# Altium PCB PCB1.PcbDoc
Units mm, origin at the board's own origin, x right, y up, seen from the top; angles counter-clockwise.
Board outline 12 x 17.6 mm, 2 copper layers (Top Layer, Bottom Layer); 9 components, 7 nets, 27 pads, 5 vias.
Unrouted connection lines stored in the file: 1.
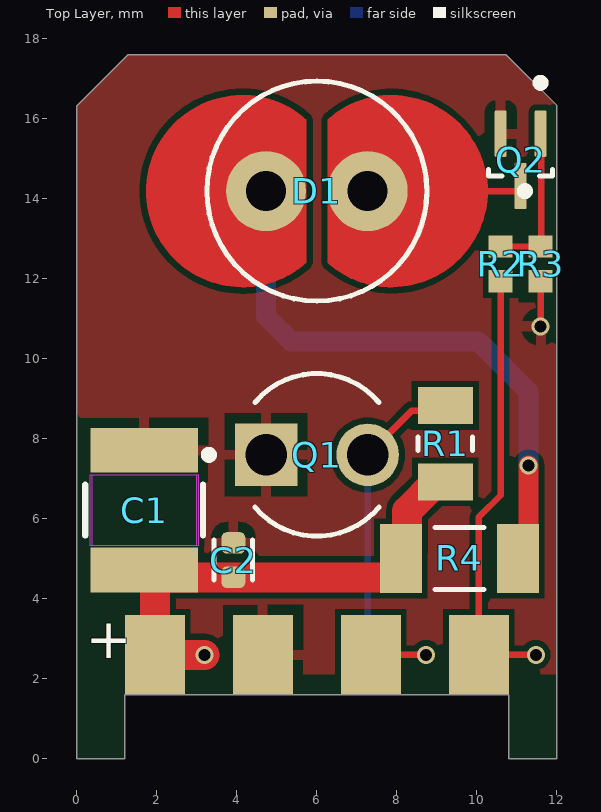
[diagram p0: Top Layer view]
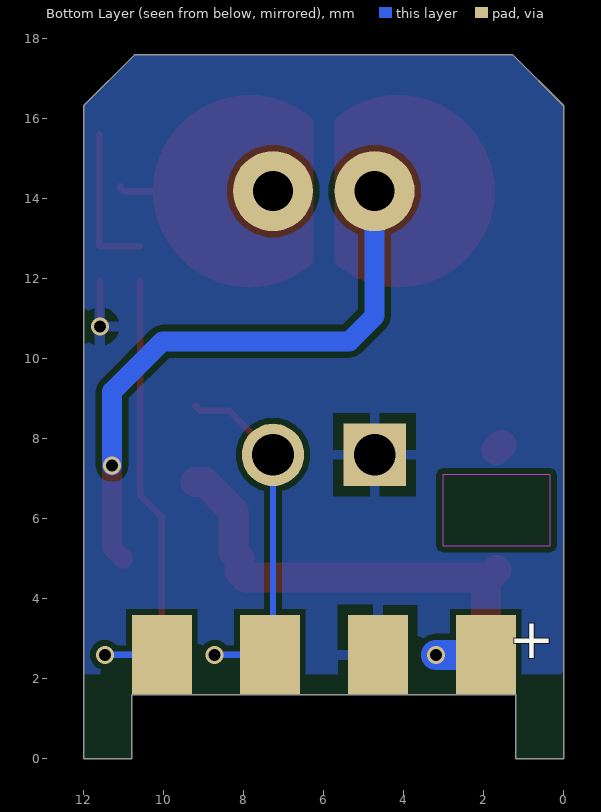
[diagram p1: Bottom Layer view, seen from below]
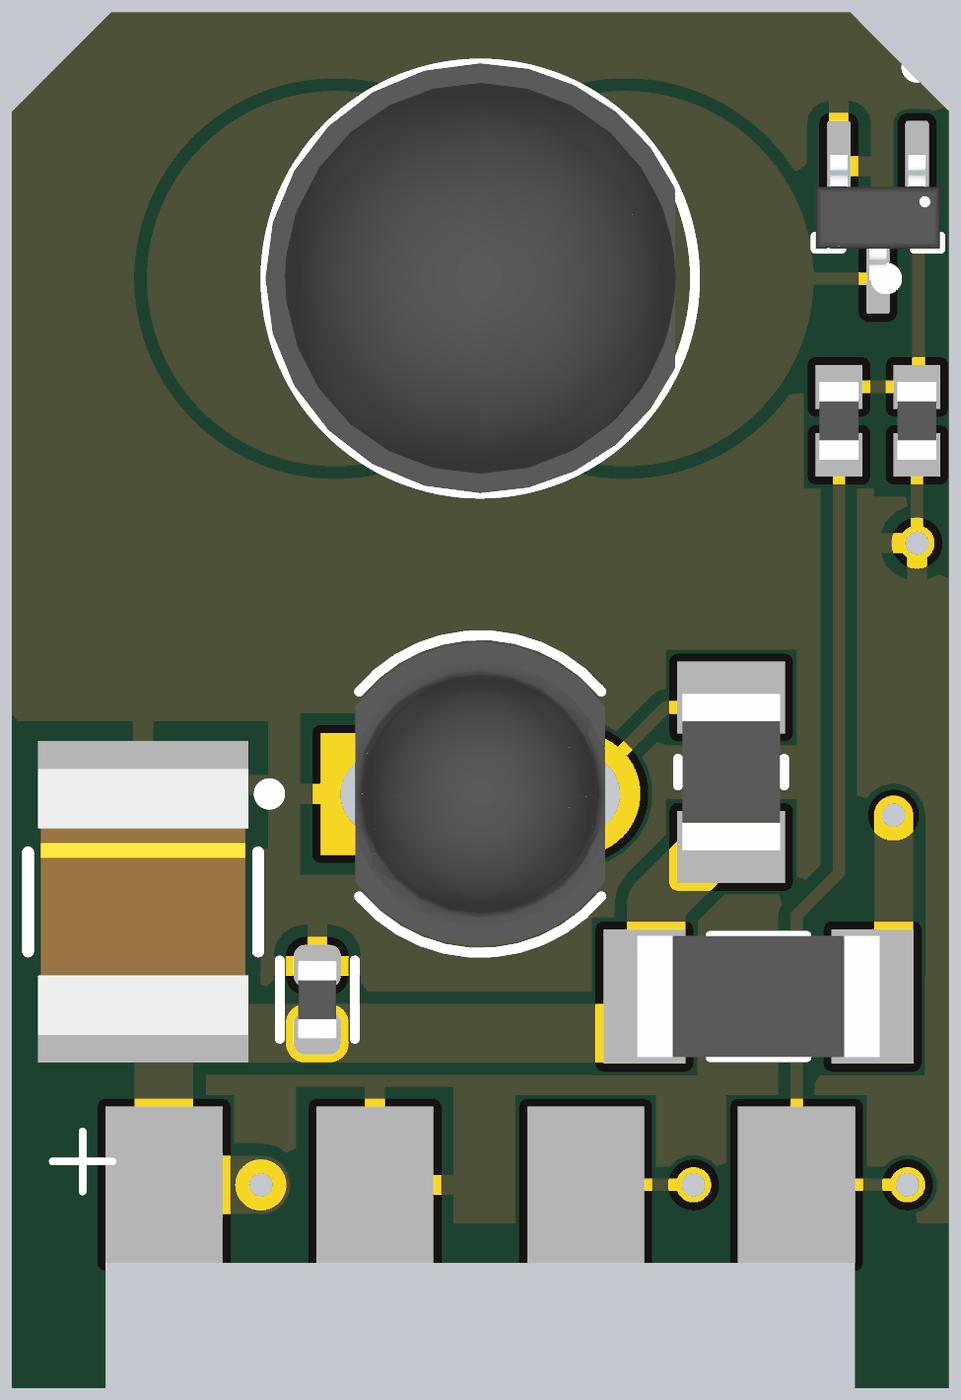
[diagram p2: 3D render of the assembled board from above, using the file's embedded part models]

## Layer stack, top to bottom
Top Solder: solder mask 0.0102, Solder Resist, Dk 3.5
Top Layer: signal copper 0.0356
Dielectric 1: dielectric 0.32, FR-4, Dk 4.8
Bottom Layer: signal copper 0.0356
Bottom Solder: solder mask 0.0102, Solder Resist, Dk 3.5

## Board outline
0,0 0,16.327 1.273,17.6 10.733,17.6 12,16.333 12,0 10.8,0 10.8,1.602 1.202,1.602 1.2,1.601 1.2,0

## Design rules (kind name [scope] priority, off if disabled: settings)
Clearance [All] p1: gap=0.15 ignorepadtopadclearanceinfootprint=FALSE
PolygonConnect [All] p1: connectstyle=Relief reliefconductorwidth=0.254 reliefentries=4 polygonreliefangle="90 Angle" airgapwidth=0.254
RoutingVias [All] p1: holewidth=0.3 width=0.45 viastyle="Through Hole" minholewidth=0.3 minwidth=0.45 maxholewidth=0.3 maxwidth=0.45
SolderMaskExpansion [All] p1: expansion=0.102 istentingtop=FALSE
Width [All] p1: maxlimit=0.75 minlimit=0.16 preferedwidth=0.5
30 further rules are at their usual default settings.

## Components (designator, comment, footprint, x,y, rotation, side; value= is the part's Value field where it differs from the comment)
C1 "C126615" CAP_CC1210_YAG 1.683,6.22 r270 top
C2 "C541465" CAPC1005X55N 3.913,4.97 r270 top
D1 "C2900372" DIO_SFH_4545 6,14.194 r180 top
Q1 "C118301" XDCR_TEFT4300 6,7.601 r0 top locked
Q2 "C2830301" SOT50P160X90-3N 11.093,14.977 r270 top
R1 "C865639" RESC2012X60N 9.213,7.88 r270 top
R2 "C705627" RESC1005X35N 10.593,12.375 r90 top
R3 "C281778" RESC1005X35N 11.593,12.375 r90 top
R4 "C17970" RESC3115X65N 9.563,5.01 r180 top

## Footprints (in the part's own frame and the unit in brackets; to place one, negate y for a bottom-side part, rotate by r counter-clockwise, add the part's x,y. Pads: shape width x height; smd on the part's side, far side on the other; paste and mask are expansions set on the pad)
CAP_CC1210_YAG [mil]
  rect 44x106 smd paste+0 mask+0: 1(-59,0) 2(59,0)
  Top Layer keep-out region: -35,-51 -35,51 35,51 35,-51
  Keep-Out Layer region: -35,-53 -35,53 35,53 35,-53
  silkscreen extent -25,-58 25,58, body extent -67,-53 67,53, height 106
CAPC1005X55N [mm]
  rrect53% 0.54x0.6 smd: 1(-0.43,0) 2(0.43,0)
  silkscreen extent -0.5,-0.48 0.5,0.48, body extent -0.5,-0.25 0.5,0.25, height 0.55
DIO_SFH_4545 [mm]
  round 2 hole 1: A(1.27,0) C(-1.27,0)
  Top Layer region: -1.768,2.399 -1.71,2.396 -1.652,2.392 -1.593,2.387 -1.535,2.38 -1.478,2.371 -1.42,2.361 -1.363,2.35 -1.306,2.337 -1.249,2.323 -1.193,2.307 -1.137,2.29 -1.081,2.272 -1.026,2.252 -0.972,2.231 -0.918,2.209 -0.864,2.185 -0.812,2.16 -0.76,2.133 -0.708,2.105 -0.657,2.076 -0.608,2.046 -0.558,2.014 -0.51,1.982 -0.462,1.948 -0.416,1.912 -0.37,1.876 -0.325,1.839 -0.27,1.79 -0.27,0.06 -0.27,-1.79 -0.325,-1.839 -0.37,-1.876 -0.416,-1.912 -0.462,-1.948 -0.51,-1.982 -0.558,-2.014 -0.608,-2.046 -0.657,-2.076 -0.708,-2.105 -0.76,-2.133 -0.812,-2.16 -0.864,-2.185 -0.918,-2.209 -0.972,-2.231 -1.026,-2.252 -1.081,-2.272 -1.137,-2.29 -1.193,-2.307 -1.249,-2.323 -1.306,-2.337 -1.363,-2.35 -1.42,-2.361 -1.478,-2.371 -1.535,-2.38 -1.593,-2.387 -1.652,-2.392 -1.71,-2.396 -1.768,-2.399 -1.827,-2.4 -1.895,-2.4 -2.028,-2.394 -2.152,-2.383 -2.275,-2.364 -2.398,-2.34 -2.519,-2.309 -2.638,-2.272 -2.755,-2.229 -2.869,-2.179 -2.981,-2.124 -3.09,-2.063 -3.195,-1.997 -3.297,-1.925 -3.396,-1.848 -3.49,-1.766 -3.579,-1.68 -3.664,-1.589 -3.745,-1.493 -3.82,-1.394 -3.89,-1.29 -3.954,-1.184 -4.013,-1.074 -4.066,-0.961 -4.114,-0.846 -4.155,-0.728 -4.19,-0.608 -4.219,-0.487 -4.241,-0.364 -4.257,-0.241 -4.267,-0.116 -4.27,0 -4.267,0.116 -4.257,0.241 -4.241,0.364 -4.219,0.487 -4.19,0.608 -4.155,0.728 -4.114,0.846 -4.066,0.961 -4.013,1.074 -3.954,1.184 -3.89,1.29 -3.82,1.394 -3.745,1.493 -3.664,1.589 -3.579,1.68 -3.49,1.766 -3.396,1.848 -3.297,1.925 -3.195,1.997 -3.09,2.063 -2.981,2.124 -2.869,2.179 -2.755,2.229 -2.638,2.272 -2.519,2.309 -2.398,2.34 -2.275,2.364 -2.152,2.383 -2.028,2.394 -1.895,2.4 -1.827,2.4
  Top Layer region: 2.028,2.394 2.152,2.383 2.275,2.364 2.398,2.34 2.519,2.309 2.638,2.272 2.755,2.229 2.869,2.179 2.981,2.124 3.09,2.063 3.195,1.997 3.297,1.925 3.396,1.848 3.49,1.766 3.579,1.68 3.664,1.589 3.745,1.493 3.82,1.394 3.89,1.29 3.954,1.184 4.013,1.074 4.066,0.961 4.114,0.846 4.155,0.728 4.19,0.608 4.219,0.487 4.241,0.364 4.257,0.241 4.267,0.116 4.27,0 4.267,-0.116 4.257,-0.241 4.241,-0.364 4.219,-0.487 4.19,-0.608 4.155,-0.728 4.114,-0.846 4.066,-0.961 4.013,-1.074 3.954,-1.184 3.89,-1.29 3.82,-1.394 3.745,-1.493 3.664,-1.589 3.579,-1.68 3.49,-1.766 3.396,-1.848 3.297,-1.925 3.195,-1.997 3.09,-2.063 2.981,-2.124 2.869,-2.179 2.755,-2.229 2.638,-2.272 2.519,-2.309 2.398,-2.34 2.275,-2.364 2.152,-2.383 2.028,-2.394 1.895,-2.4 1.827,-2.4 1.768,-2.399 1.71,-2.396 1.652,-2.392 1.593,-2.387 1.535,-2.38 1.478,-2.371 1.42,-2.361 1.363,-2.35 1.306,-2.337 1.249,-2.323 1.193,-2.307 1.137,-2.29 1.081,-2.272 1.026,-2.252 0.972,-2.231 0.918,-2.209 0.864,-2.185 0.812,-2.16 0.76,-2.133 0.708,-2.105 0.657,-2.076 0.608,-2.046 0.558,-2.014 0.51,-1.982 0.462,-1.948 0.416,-1.912 0.37,-1.876 0.325,-1.839 0.27,-1.79 0.27,0.06 0.27,1.79 0.325,1.839 0.37,1.876 0.416,1.912 0.462,1.948 0.51,1.982 0.558,2.014 0.608,2.046 0.657,2.076 0.708,2.105 0.76,2.133 0.812,2.16 0.864,2.185 0.918,2.209 0.972,2.231 1.026,2.252 1.081,2.272 1.137,2.29 1.193,2.307 1.249,2.323 1.306,2.337 1.363,2.35 1.42,2.361 1.478,2.371 1.535,2.38 1.593,2.387 1.652,2.392 1.71,2.396 1.768,2.399 1.827,2.4 1.895,2.4
  silkscreen extent -5.3,-2.75 2.75,2.75, body extent -2.5,-2.76 2.75,2.75, height 11.84
RESC1005X35N [mm]
  rect 0.56x0.6 smd: 1(-0.435,0) 2(0.435,0)
  body extent -0.5,-0.25 0.5,0.25, height 0.35
RESC2012X60N [mm]
  rect 0.92x1.38 smd: 1(-0.955,0) 2(0.955,0)
  silkscreen extent -0.17,-0.68 0.17,0.68, body extent -1,-0.63 1,0.63, height 0.6
RESC3115X65N [mm]
  rect 1.05x1.72 smd paste+0 mask+0.102: 1(-1.46,0) 2(1.46,0)
  silkscreen extent -0.62,-0.77 0.62,0.77, body extent -1.55,-0.77 1.55,0.77, height 0.65
SOT50P160X90-3N [mm]
  rrect25% 1.16x0.3 smd: 1(-0.655,0.5) 2(-0.655,-0.5) 3(0.655,0)
  silkscreen extent -2.02,-0.8 0.4,0.8, body extent -0.8,-0.8 0.8,0.8, height 0.8
XDCR_TEFT4300 [mm]
  round 1.56 hole 1.04: C(1.27,0)
  rect 1.56x1.56 / inner round 1.56 / far side rect 1.56x1.56 hole 1.04: E(-1.27,0)
  silkscreen extent -2.8,-2.03 1.55,2.03, body extent -1.6,-1.95 1.6,1.95, height 6.1

## Part data
C1: library part CC1210KKX7R7BB226, "Description", Manufacturer_Name=Yageo, Copyright="Copyright (C) 2026 Ultra Librarian. All rights reserved.", Manufacturer_Part_Number=CC1210KKX7R7BB226
C2: library part CC0402JRX7R8BB103, "10000 pF Â±5% 25V Ceramic Capacitor X7R 0402 (1005 Metric)", Package="0402 Yageo", Check_prices=https://www.snapeda.com/parts/CC0402JRX7R8BB103/Yageo/view-part/?ref=eda, MF=Yageo, MP=CC0402JRX7R8BB103, SnapEDA_Link=https://www.snapeda.com/parts/CC0402JRX7R8BB103/Yageo/view-part/?ref=snap
D1: library part SFH_4545, "Infrared (IR) Emitter 950nm 1.5V 100mA 550mW/sr @ 100mA 10Â° Radial", Package=None, Check_prices=https://www.snapeda.com/parts/SFH%204545/OSRAM/view-part/?ref=eda, MF="OSRAM Opto", MP="SFH 4545", SnapEDA_Link=https://www.snapeda.com/parts/SFH%204545/OSRAM/view-part/?ref=snap
Q1: library part TEFT4300, "Phototransistors 925nm Top View Radial, 3mm Dia (T-1)", Package=None, Check_prices=https://www.snapeda.com/parts/TEFT4300/Vishay/view-part/?ref=eda, MF="Vishay Semiconductor", MP=TEFT4300, SnapEDA_Link=https://www.snapeda.com/parts/TEFT4300/Vishay/view-part/?ref=snap
Q2: library part DMG1012T-7, "MOSFET N-Channel 20V 0.63A SOT523", Package="SOT-523 Diodes Inc.", Check_prices=https://www.snapeda.com/parts/DMG1012T-7/Diodes+Inc./view-part/?ref=eda, MF="Diodes Inc.", MP=DMG1012T-7, SnapEDA_Link=https://www.snapeda.com/parts/DMG1012T-7/Diodes+Inc./view-part/?ref=snap
R1: library part RT0805BRD07510RL, "5.6 Ohm 1/4W Thick Film Resistor 1206 Chip - Surface Mount", Package="1206-2 ROYAL", Check_prices=https://www.snapeda.com/parts/1206W4F560KT5E/Uni-Royal/view-part/?ref=eda, MF=Uni-Royal, MP=1206W4F560KT5E, SnapEDA_Link=https://www.snapeda.com/parts/1206W4F560KT5E/Uni-Royal/view-part/?ref=snap
R2 R3: library part RT0402FRE0724KL, "RT Series 0402 0.063 W 24 kOhm Â±1 % Â±50 ppm/Â°C SMT Thin Film Chip Resistor", Package="1005 Yageo", Check_prices=https://www.snapeda.com/parts/RT0402FRE0724KL/Yageo/view-part/?ref=eda, MF=Yageo, MP=RT0402FRE0724KL, SnapEDA_Link=https://www.snapeda.com/parts/RT0402FRE0724KL/Yageo/view-part/?ref=snap
R4: library part 1206W4F560KT5E, "5.6 Ohm 1/4W Thick Film Resistor 1206 Chip - Surface Mount", Package="1206-2 ROYAL", Check_prices=https://www.snapeda.com/parts/1206W4F560KT5E/Uni-Royal/view-part/?ref=eda, MF=Uni-Royal, MP=1206W4F560KT5E, SnapEDA_Link=https://www.snapeda.com/parts/1206W4F560KT5E/Uni-Royal/view-part/?ref=snap

## Free pads (board coordinates)
  rect 1.5x2 smd far side: 15(1.95,2.601) 15(4.65,2.601) 15(7.35,2.601) 15(10.05,2.601)
  rect 1.5x2 smd: 15(1.95,2.601) 15(4.65,2.601) 15(7.35,2.601) 15(10.05,2.601)

## Via types
v1: diameter 0.45, hole 0.3, Top Layer to Bottom Layer, 5 vias

## Nets (pads, with @x,y where several pads share a name; then routed paths per layer and width w, separated by ;. In a path a pad name is that pad's centre, name@x,y a point inside that pad or via, vN(x,y) a via of type N, cw(c..) or ccw(c..) an arc to the next point about the centre after c; other vN are vias at no path point)
3.3V: C1.2 C2.2 pad.15@1.95,2.601 R1.2 R4.2 | length 13.8
  Top Layer w0.75: C1.2 1.864,4.54 C1.2@1.948,4.54 ; v1(3.19,2.6) 1.951,2.6 1.95,2.601 1.95,4.538 C1.2@1.948,4.54 ; R1.2 8.983,6.925 8.253,6.195 8.253,5.16 R4.2 8.103,4.69 7.953,4.54 C2.2 C1.2@1.948,4.54
  Bottom Layer w0.75: pad.15@1.95,2.601 1.951,2.6 v1(3.19,2.6)
GND: C1.1 C2.1 pad.15@4.65,2.601 Q1.E Q2.2 R3.1 | length 1.3
  Top Layer w0.16: v1(11.593,10.81) R3.1
  Top Layer w0.75: C1.1@1.556,7.846 C1.1
NetD1_A: D1.A R4.1 | length 14.8
  Top Layer w0.5: R4.1 11.293,5.28 v1(11.293,7.33)
  Bottom Layer w0.5: D1.A 4.73,11.067 5.357,10.44 10.033,10.44 11.293,9.18 v1(11.293,7.33)
NetD1_C: D1.C Q2.3 | length 3.9
  Top Layer w0.16: D1.C 11.023,14.194 11.093,14.264 Q2.3
NetIR_1: pad.15@7.35,2.601 Q1.C R1.1 | length 10.3
  Top Layer w0.16: Q1.C 8.377,8.708 9.086,8.708 R1.1 ; pad.15@7.35,2.601 v1(8.732,2.601)
  Bottom Layer w0.16: Q1.C 7.27,2.681 7.35,2.601 v1(8.732,2.601)
NetON/OFF_1: pad.15@10.05,2.601 R2.1 | length 12.4
  Top Layer w0.16: R2.1 10.593,6.59 10.05,6.047 10.05,2.601 v1(11.472,2.601)
  Bottom Layer w0.16: pad.15@10.069,2.62 10.05,2.601 v1(11.472,2.601)
NetQ2_1: Q2.1 R2.2 R3.2 | length 3.8
  Top Layer w0.16: R2.2 R3.2 11.613,12.83 Q2.1@11.613,15.612

## Polygon pours and split planes (outlines as drawn)
GND on Top Layer "GND_L01_P000" (solid, remove dead copper, pour order 0): 0,2.11 0,16.327 1.273,17.6 10.733,17.6 12,16.333 12,2.11 2.231,2.11
GND on Bottom Layer "GND_L02_P001" (solid, remove dead copper, pour order 1): 0,2.11 0,16.327 1.273,17.6 10.733,17.6 12,16.333 12,2.11 2.231,2.11

## Silkscreen, mask and mechanical layers (free items; w line width, h text height)
Top Overlay:
  text "+" at 0.223,2.513 h1
Bottom Overlay:
  text "+" at 0.223,2.513 h1